# Altium PCB PDB.PcbDoc (part 1 of 3)
Units mil, origin at the board's own origin, x right, y up, seen from the top; angles counter-clockwise.
Board outline 4724.41 x 3149.61 mil, 2 copper layers (Top Layer, Bottom Layer); 64 components, 33 nets, 163 pads, 36 vias.
Unrouted connection lines stored in the file: 2.
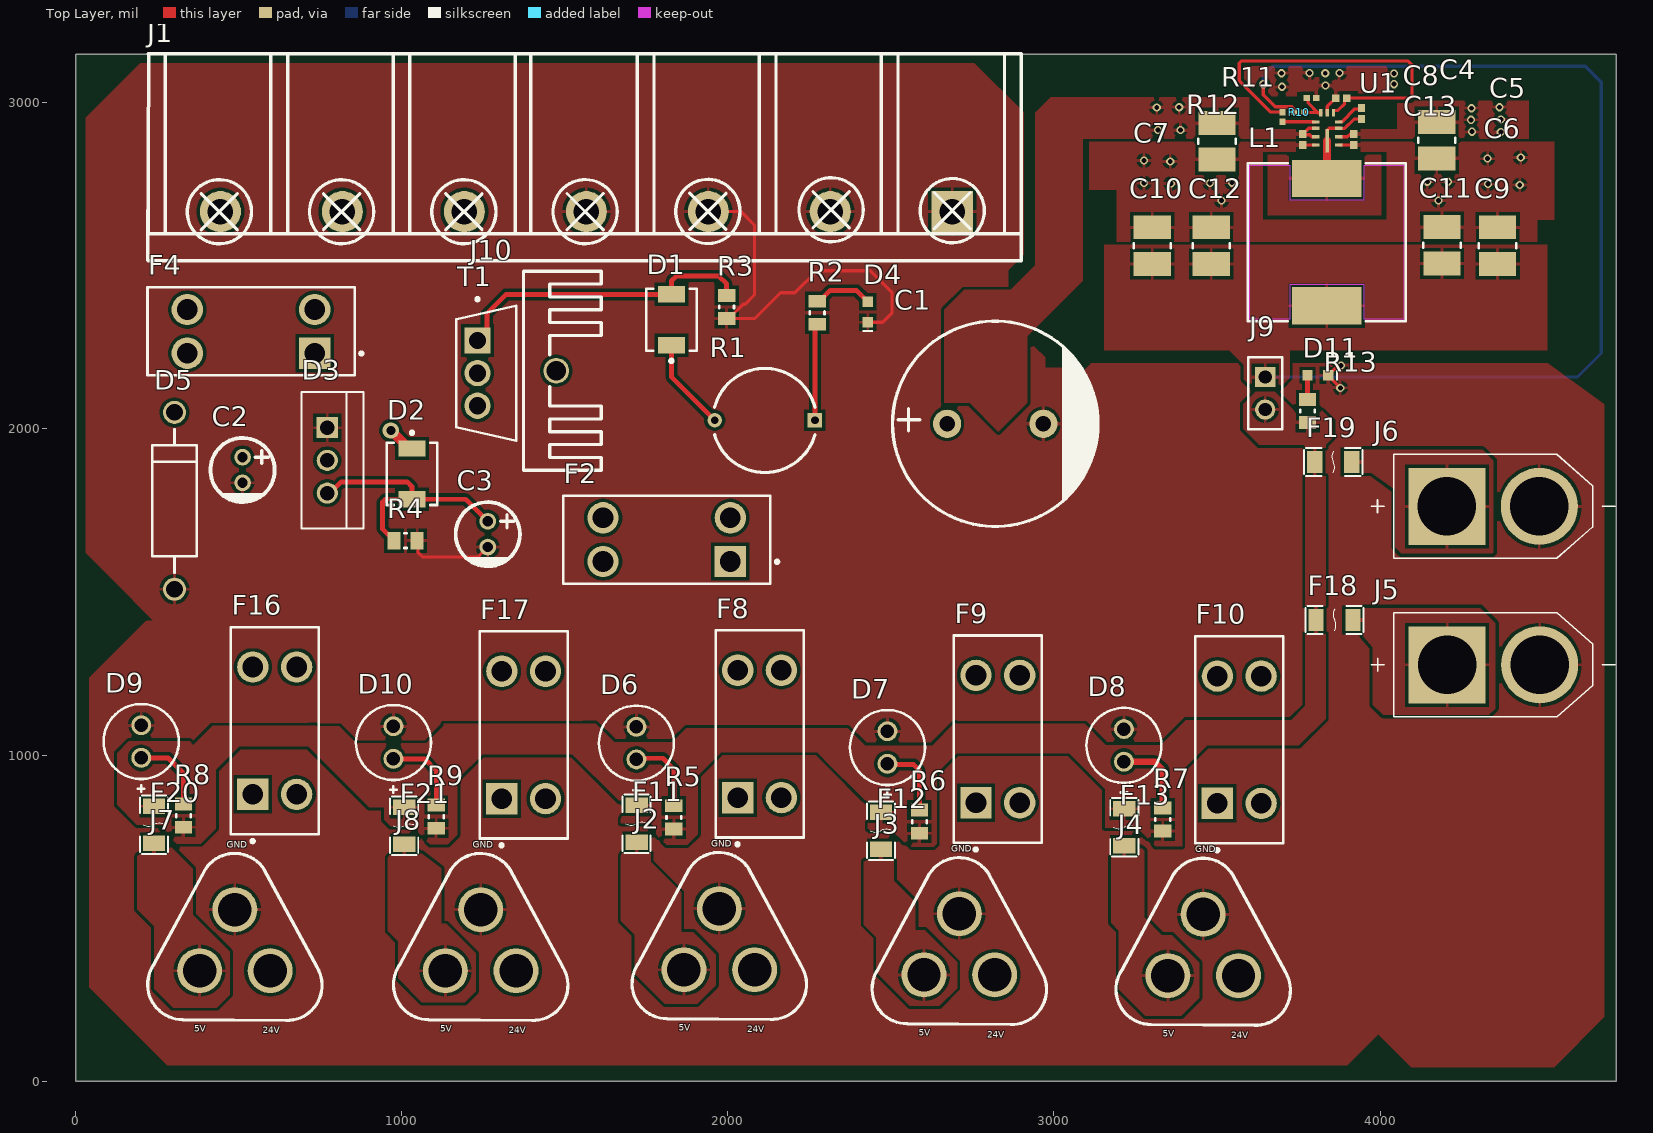
[diagram p0: Top Layer view]
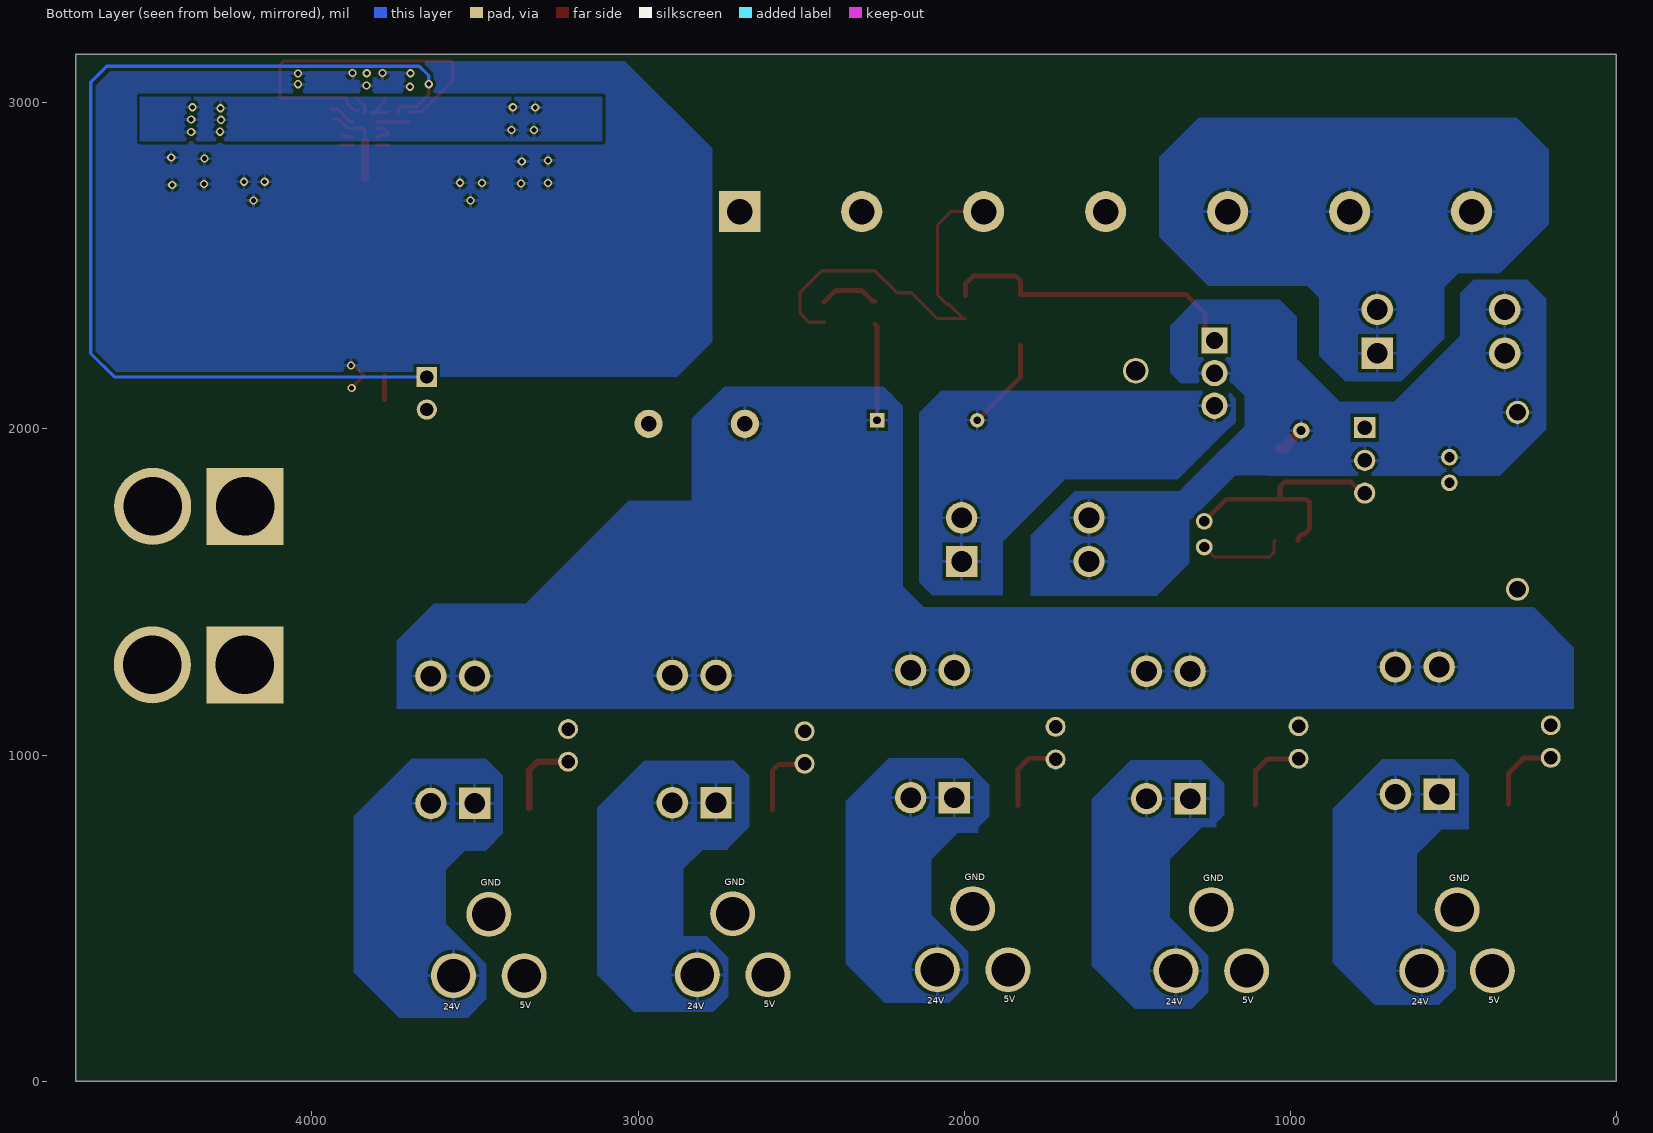
[diagram p1: Bottom Layer view, seen from below]
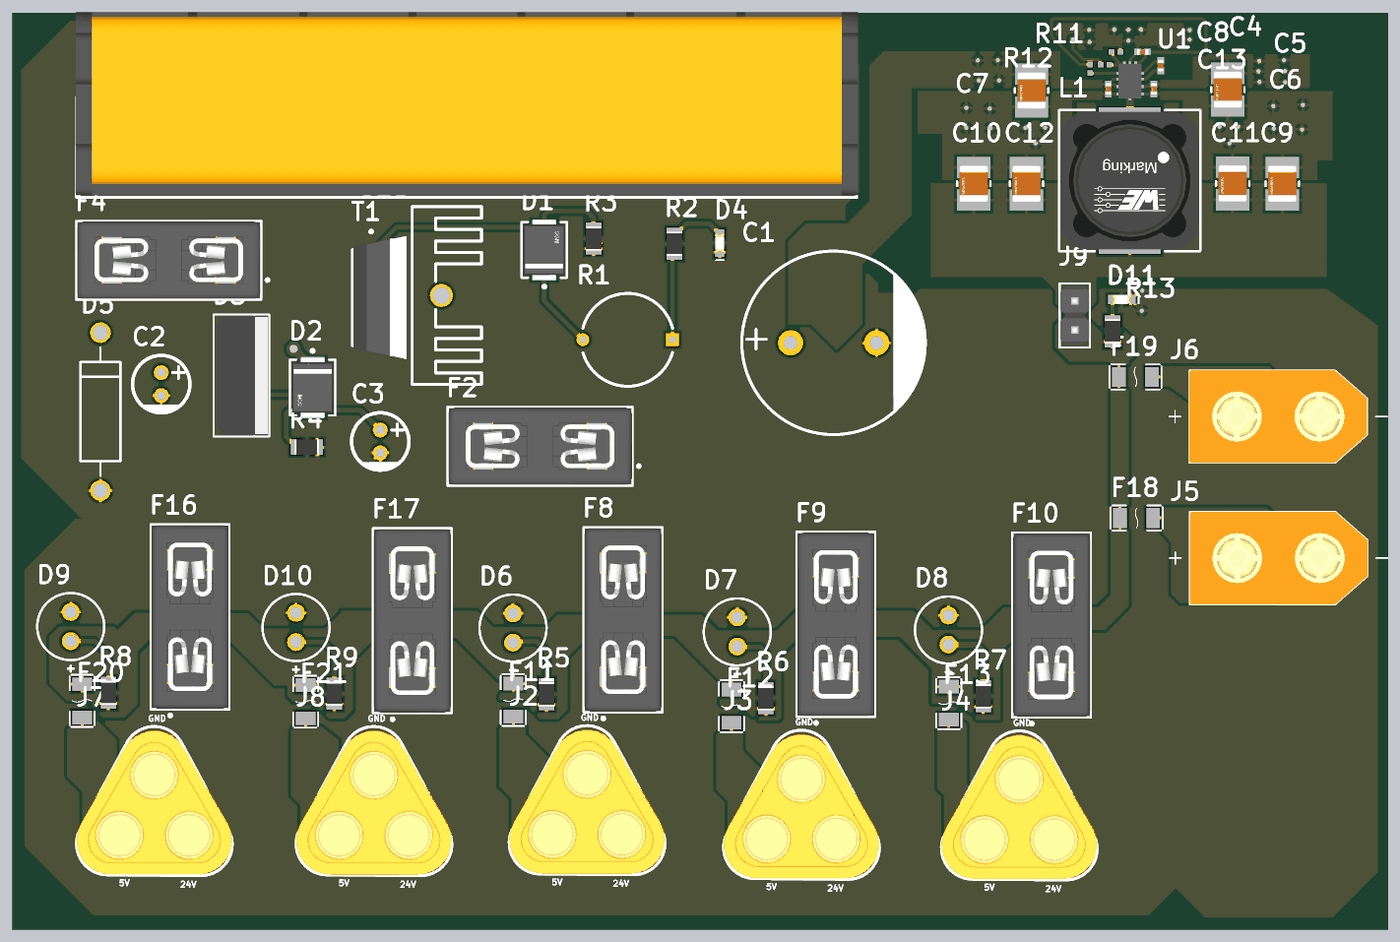
[diagram p2: 3D render of the assembled board from above, using the file's embedded part models]

## Layer stack, top to bottom
Top Solder: solder mask 0.4, Solder Resist, Dk 3.5
Top Layer: signal copper 1.4
Dielectric 1: dielectric 12.6, FR-4, Dk 4.8
Bottom Layer: signal copper 1.4
Bottom Solder: solder mask 0.4, Solder Resist, Dk 3.5

## Board outline
0,0 4724.41,0 4724.41,3149.61 0,3149.61

## Design rules (kind name [scope] priority, off if disabled: settings)
Clearance [All] p1: gap=10 ignorepadtopadclearanceinfootprint=FALSE
PolygonConnect [All] p1: connectstyle=Relief reliefconductorwidth=10 reliefentries=4 polygonreliefangle="90 Angle" airgapwidth=10
RoutingVias [All] p1: holewidth=28 width=50 viastyle="Through Hole" minholewidth=28 minwidth=50 maxholewidth=28 maxwidth=50
SolderMaskExpansion [All] p1: expansion=4 istentingtop=FALSE
SupplyNets "Schematic Supply Nets_3" [InNet('5V')] p1: voltage=0.000
SupplyNets "Schematic Supply Nets_2" [InNet('5V_Buck Out')] p2: voltage=0.000
SupplyNets "Schematic Supply Nets_1" [InNet('GND')] p3: voltage=0.000
SupplyNets "Schematic Supply Nets" [InNet('24_In')] p4: voltage=0.000
Width [All] p1: maxlimit=100 minlimit=10 preferedwidth=20 minimp=50.000000 maximp=50.000000 favimp=50.000000
30 further rules are at their usual default settings.

## Classes and differential pairs
component class Connectors: D6 D7 D8 D9 D10 F5 F6 F7 F8 F9 F10 F11 F12 F13 F14 F15 F16 F17 F18 F19 F20 F21 J2 J3 J4 J5 J6 J7 J8 R5 R6 R7 R8 R9

## Components (designator, comment, footprint, x,y, rotation, side; value= is the part's Value field where it differs from the comment)
C1 "2200uF 50V cap" "Capacitor through hole" 2819.88,2015.75 r0 top value=2.2mF
C2 "0.1uF 50V THT" "capacitor Through Hole Small" 511.81,1874.02 r270 top value=100nF
C3 "0.1uF 50V THT" "capacitor Through Hole Small" 1263.78,1677.17 r270 top value=100nF
C4 "0.1uF X7R 0402" "0402 CAPACITOR" 3942.91,2967.52 r270 top value=100nF
C5 "100nF X7R 1210 50V" "1210 capacitor" 4173.47,2885.04 r270 top value=100nF
C6 "4.7nF X7R 0402 50V" "0402 CAPACITOR" 3919.53,2887.41 r270 top value=4.7nF
C7 "100nF X7R 1210 50V" "1210 capacitor" 3499.76,2882.1 r270 top value=100nF
C8 "4.7nF X7R 0402 50V" "0402 CAPACITOR" 3763.19,2887.37 r270 top value=4.7nF
C9 "22uF X7R 1210" "1210 capacitor" 4360.24,2562.01 r270 top value=22µF
C10 "22uF X7R 1210" "1210 capacitor" 3301.18,2562.01 r270 top value=22µF
C11 "22uF X7R 1210" "1210 capacitor" 4189.96,2562.99 r270 top value=22µF
C12 "22uF X7R 1210" "1210 capacitor" 3482.28,2562.01 r270 top value=22µF
C13 "1uF 16V 0402" "0402 CAPACITOR" 3880.85,3014.36 r180 top value=100nF
D1 "10V Zener Diode" "27V Zener diode" 1826.77,2334.65 r90 top
D2 "27V Zener Diode" "27V Zener diode" 1031.5,1862.2 r270 top
D3 "Thyristor" Thyristor 771.65,2003.94 r270 top
D4 "RED LED" "red led" 2429.13,2358.27 r90 top
D5 "27V TVS Diode" "27V TVS Diode" 303.15,1779.53 r270 top
D6 "GREEN LED" "LED Through Hole" 1719.45,1036.5 r90 top
D7 "GREEN LED" "LED Through Hole" 2489.34,1023.1 r90 top
D8 "GREEN LED" "LED Through Hole" 3214.4,1029.65 r90 top
D9 "GREEN LED" "LED Through Hole" 201.14,1041.46 r90 top
D10 "GREEN LED" "LED Through Hole" 974.56,1038.41 r90 top
D11 "RED LED" "red led" 3809.06,2164.37 r180 top
F2 "Fuse Holder" "FUSE HOLDER" 1812.4,1660.43 r180 top
F4 "Fuse Holder" "FUSE HOLDER" 537.8,2299.21 r180 top
F8 "Fuse Holder" "FUSE HOLDER" 2097.28,1064.79 r90 top
F9 "Fuse Holder" "FUSE HOLDER" 2827.77,1049.04 r90 top
F10 "Fuse Holder" "FUSE HOLDER" 3568.21,1046.85 r90 top
F11 "1.25 Fuse 1206" "Fuse 1206" 1720.34,789.33 r270 top value=57mΩ
F12 "1.25 Fuse 1206" "Fuse 1206" 2469.25,768.05 r270 top value=57mΩ
F13 "1.25 Fuse 1206" "Fuse 1206" 3215.55,778.54 r270 top value=57mΩ
F16 "Fuse Holder" "FUSE HOLDER" 610.49,1074.7 r90 top
F17 "Fuse Holder" "FUSE HOLDER" 1373.86,1061.72 r90 top
F18 "1.25 Fuse 1206" "Fuse 1206" 3860.24,1414.37 r180 top value=57mΩ
F19 "1.25 Fuse 1206" "Fuse 1206" 3856.3,1898.62 r180 top value=57mΩ
F20 "1.25 Fuse 1206" "Fuse 1206" 240.16,786.42 r270 top value=57mΩ
F21 "1.25 Fuse 1206" "Fuse 1206" 1007.55,783.37 r270 top value=57mΩ
J1 "SMPS_IN_1" "7 LUG PIN HEADER" 1565.94,2666.34 r180 top
J2 "M1" MT-60 1973.64,396.65 r0 top
J3 "M2" MT-60 2709.65,380.91 r0 top
J4 "M3" MT-60 3457.51,378.72 r0 top
J5 "Main Controller" XT60-M 4347.44,1276.57 r0 top
J6 "Extra" XT60-M 4346.46,1762.45 r0 top
J7 "M4" MT-60 488.19,393.7 r0 top
J8 "M5" MT-60 1242.13,393.58 r0 top
J9 "2 pin male connector" "2 pin connector" 3647.64,2109.45 r270 top
J10 "Heat Sink" "HEAT SINK" 1473.68,2178.33 r270 top
L1 "8.2uH 6.25A 20mOhm" inductor 3836.61,2572.66 r180 top value=8.2µH
R1 "0.3ohm Thermister" thermistor 2113.19,2026.57 r180 top value=300mΩ
R2 "2.2k 0805 res" "0805 1K Resistor" 2273.74,2356.19 r270 top value=2.2kΩ
R3 "10K 0805 1/8W" "0805 1K Resistor" 1996.06,2374.02 r90 top value=10kΩ
R4 "1k 1/8W Res" "0805 1K Resistor" 1011.81,1657.48 r180 top value=1kΩ
R5 "1k 1/8W Res" "0805 1K Resistor" 1834.51,809.02 r270 top value=1kΩ
R6 "1k 1/8W Res" "0805 1K Resistor" 2587.36,795.61 r270 top value=1kΩ
R7 "1k 1/8W Res" "0805 1K Resistor" 3333.66,802.17 r270 top value=1kΩ
R8 "1k 1/8W Res" "0805 1K Resistor" 330.71,813.98 r270 top value=1kΩ
R9 "1k 1/8W Res" "0805 1K Resistor" 1105.98,810.93 r270 top value=1kΩ
R10 "100k 0402 Res" "0402 resistor" 3751.76,2970.99 r180 top value=100kΩ
R11 "24.9K 0402 res" "0402 resistor" 3789.37,3014.76 r0 top value=24.9kΩ
R12 "100k 0402 Res" "0402 resistor" 3700.29,2956.57 r270 top value=100kΩ
R13 "1k 1/8W Res" "0805 1K Resistor" 3777.56,2055.12 r270 top value=1kΩ
T1 "P Channel Mosfet" "P-Ch Mosfet" 1259.15,2171.21 r0 top value=9.3mΩ
U1 "24V-5V Buck" "BUCK CONVERTER" 3837.61,2914.77 r180 top

## Footprints (in the part's own frame and the unit in brackets; to place one, negate y for a bottom-side part, rotate by r counter-clockwise, add the part's x,y. Pads: shape width x height; smd on the part's side, far side on the other; paste and mask are expansions set on the pad)
"2 pin connector" [mm]
  rect 1.57x1.57 hole 1.02 paste-2539.97 mask+0: 1(-1.27,0)
  round 1.57 hole 1.02 paste-2539.97 mask+0: 2(1.27,0)
  silkscreen extent -2.79,-1.32 2.79,1.32, body extent -2.89,-1.42 2.89,1.42, height 0.25
"7 LUG PIN HEADER" [mm]
  rect 3.21x3.2 hole 2: 1(-28.5,0)
  round 3.2 hole 2: 2(-19,0) 3(-9.5,0) 4(0,0) 5(9.5,0) 6(19,0) 7(28.5,0)
  silkscreen extent -33.87,-12.3 34.16,3.82, body extent -33.97,-12.32 34.23,3.68, height 16.5
"27V TVS Diode" [mm] "AXIAL, 2-Leads, Diameter 3.49mm"
  round 1.8 hole 1.3: 1(-6.887,0) 2(6.887,0)
  silkscreen extent -5.59,-1.75 5.59,1.75
"27V Zener diode" [mm]
  rect 1.27x2.11 smd paste+0 mask+0: 1(-1.98,0) 2(1.98,0)
  silkscreen extent -3.32,-1.97 2.42,1.97, body extent -2.72,-2.07 2.72,2.07, height 0.25
"0402 CAPACITOR" [mil]
  rect 24.23x22.54 smd paste+0 mask+0: 1(-16.87,0) 2(16.87,0)
  body extent -35,-17 35,17, height 10
"0402 resistor" [mm] "Chip Resistor, 2-Leads, Body 1.00x0.50mm, IPC High Density"
  rect 0.5x0.45 smd: 1(-0.375,0) 2(0.375,0)
  body extent -0.53,-0.27 0.53,0.28, height 0.4
"0805 1K Resistor" [mm] "Chip Resistor, 2-Leads, Body 2.1x1.35mm, IPC Medium Density"
  rect 1x1.35 smd: 1(-0.9,0) 2(0.9,0)
  silkscreen extent -0.1,-0.58 0.1,0.58, body extent -1.05,-0.68 1.05,0.67, height 0.6
"1210 capacitor" [mil]
  rect 72.94x114.34 smd paste+0 mask+0: 1(-56.11,0) 2(56.11,0)
  silkscreen extent -8,-57 8,57, body extent -112,-77 112,77, height 10
"BUCK CONVERTER" [mm]
  rect 0.6x0.25 smd paste+0 mask+0: 1(-0.9,1.125) 2(-0.9,0.475) 3(-0.9,-0.175) 4(-0.9,-0.675) 8(0.9,-0.675) 9(0.9,-0.175) 10(0.9,0.475) 11(0.9,1.125)
  rect 0.25x0.6 smd paste+0 mask+0: 5(-0.5,-1.4) 6(0,-1.4) 7(0.5,-1.4)
  rect 0.25x1.825 smd paste-0.9 mask+0: 12(0,0.788)
  body extent -1,-1.5 1,1.5, height 1
"Capacitor through hole" [mm]
  round 2.2 hole 1.2: 1(-3.75,0) 2(3.75,0)
  silkscreen extent -8,-8 8,8
"capacitor Through Hole Small" [mm]
  round 1.3 hole 0.8: 1(-1,0) 2(1,0)
  silkscreen extent -2.5,-2.5 2.5,2.5
"Fuse 1206" [mm]
  rect 1.19x1.728 smd: 1(-1.445,0) 2(1.445,0)
  silkscreen extent -2.27,-1.09 2.27,1.09
"FUSE HOLDER" [mm]
  round 2.45 hole 1.6 paste-2539.97 mask+0: 1(-4.96,-1.7) 2(4.96,-1.7) 2(4.96,1.7)
  rect 2.45x2.45 hole 1.6 paste-2539.97 mask+0: 1(-4.96,1.7)
  silkscreen extent -8.73,-3.43 8.07,3.43, body extent -8.17,-3.53 8.17,3.53, height 0.25
"HEAT SINK" [mm]
  round 2 hole 1.5: 1(0,0)
  silkscreen extent -7.75,-2.54 7.75,3.5
inductor [mm] "SMT Shielded Power Inductor, 2-leads, body 12x12mm"
  rect 5.4x2.9 smd: 1(0,-4.95) 2(0,4.95)
  Top Layer keep-out region: -6,6 -2.9,6 -2.9,3.3 2.9,3.3 2.9,6 6,6 6,-6 2.9,-6 2.9,-3.3 -2.9,-3.3 -2.9,-6 -6,-6
  silkscreen extent -6.15,-6.15 6.15,6.15, body extent -6,-6 6,6, height 5.66
"LED Through Hole" [mm] "THD, 2-Leads, Dia 5.845mm, Pitch 2.54mm"
  round 1.55 hole 1.05: 1(-1.27,0) 2(1.27,0)
  silkscreen extent -3.92,-2.92 2.92,2.92
MT-60 [mm]
  round 3.5 hole 2.605: 1(-2.75,-1.397) 2(0,3.366) 3(2.75,-1.397)
  silkscreen extent -6.79,-5.27 6.79,7.74, body extent -6.8,-5.2 6.8,7.39, height 15
"P-Ch Mosfet" [mm]
  rect 2.05x2.05 hole 1.35 paste-2539.97 mask+0: 1(-0.683,2.54)
  round 2.05 hole 1.35 paste-2539.97 mask+0: 2(-0.683,0) 3(-0.683,-2.54)
  silkscreen extent -2.32,-5.26 2.32,5.88, body extent -2.42,-5.36 2.42,5.36, height 0.25
"red led" [mm] "SMD Mono-color Chip LED, body 1.60 x 0.80 mm"
  rect 0.8x0.8 smd: 1(-0.8,0) 2(0.8,0)
  silkscreen extent -1.55,-0.4 -1.4,0.4, body extent -0.8,-0.4 0.8,0.4, height 0.7
thermistor [mil]
  rect 44x44 / inner round 44 / far side rect 44x44 hole 24: 1(-153.54,0)
  round 44 hole 24: 2(153.54,0)
  silkscreen extent -154,-159 154,160
Thyristor [mil]
  rect 65x65 hole 45 paste-99999 mask+0: 1(0,0)
  round 65 hole 45 paste-99999 mask+0: 2(100.39,0) 3(200.79,0)
  silkscreen extent -109,-80 310,111, body extent -104,-74 305,106, height 774
XT60-M [mm]
  rect 6x6 / inner round 6 / far side rect 6x6 hole 4.55: 1(-3.6,0)
  round 6 hole 4.55: 2(3.6,0)
  silkscreen extent -9.5,-4.05 9.5,4.05, body extent -7.75,-4.05 7.75,4.05, height 16

## Part data
C1: library part ESE228M050AN2AA, "Aluminum Electrolytic Capacitor, Polarized, Aluminum (wet), 50V, 20% +Tol, 20% -Tol, 2200uF, Through Hole Mount", Case/Package=Aluminum, LCSC Part No=C5113332, Leakage Current=1.103mA, Manufacturer="Yageo Group", Max Operating Temperature=105°C, Min Operating Temperature=-40°C, Ripple Current=1.53A, Supplier Part Number=399-ESE228M050AN2AA-ND, Tolerance=20%, Voltage Rating=50V, Category="Aluminum Electrolytic Capacitors", componentlink1description=https://datasheet.octopart.com:443/ESE228M050AN2AA-KEMET-datasheet-182055943.pdf?src-supplier=IHS, componentlink1url=https://datasheet.octopart.com:443/ESE228M050AN2AA-KEMET-datasheet-182055943.pdf?src-supplier=IHS, Export Control Classification Number (ECCN) Code=EAR99, Lead Pitch=7.5mm, Length=36mm, Manufacturer Part Number=ESE228M050AN2AA, Number of Terminals=2, Packaging=Bulk, Pricing="1=2.22, 10=1.461, 50=1.144, 100=1.0439, 500=0.8717, 1000=0.8175, 2500=0.75967, 5000=0.72446 (USD)", RoHS=Compliant, Schedule B="8532220020, 8532220020|8532220020|8532220020|8532220020|8532220020", Stock=1668, Supplier=DigiKey, Termination=Radial, Voltage Rating (DC)=50V
C2 C3: library part 515D104M050HW6AE3, "Cap 0.1UF 50V 4X7 85C Rdl", Case/Package=Radial, Manufacturer=Vishay, Max Operating Temperature=85°C, Min Operating Temperature=-40°C, Tolerance=20%, Voltage Rating=50V, Category="Aluminum Electrolytic Capacitors", componentlink1description=http://sigma.octopart.com:80/rohs_statement/Vishay-company-15.pdf?src-supplier=Compliance+Statements, componentlink1url=http://sigma.octopart.com:80/rohs_statement/Vishay-company-15.pdf?src-supplier=Compliance+Statements, Height - Seated (Max)=7.0104mm, Lead Pitch=1.4986mm, Life (Hours)=2000hours, Manufacturer Part Number=515D104M050HW6AE3, Mounting Technology="Through Hole", Packaging=Bulk, Polarity=Polar, Pricing="5000=0.10011, 10000=0.09869, 20000=0.09727, 40000=0.09585, 80000=0.09479 (USD)", RoHS=Compliant, Supplier=Avnet, Supplier Part Number=515D104M050HW6AE3
C4: library part GCM155R71H104KE02J, "50V 100nF X7R ±10% 0402 Multilayer Ceramic Capacitors MLCC - SMD/SMT ROHS", Case Code (Imperial)=0402, Case Code (Metric)=1005, Dielectric=X7R, Dielectric Material=Ceramic, LCSC Part No=C2649549, Manufacturer=Murata, Manufacturer Lifecycle Status="IN PRODUCTION", Max Operating Temperature=125°C, Min Operating Temperature=-55°C, Ratings=AEC-Q200, Tolerance=10%, Voltage Rating=50V, Case/Package=0402, Category="Ceramic Capacitors", componentlink1description=https://datasheet.octopart.com:443/GCM155R71H104KE02J-Murata-datasheet-155345015.pdf?src-supplier=Newark, componentlink1url=https://datasheet.octopart.com:443/GCM155R71H104KE02J-Murata-datasheet-155345015.pdf?src-supplier=Newark, ComponentLink2Description=https://datasheet.octopart.com:443/GCM155R71H104KE02J-Murata-datasheet-178519985.pdf?src-supplier=Arrow.cn, ComponentLink2URL=https://datasheet.octopart.com:443/GCM155R71H104KE02J-Murata-datasheet-178519985.pdf?src-supplier=Arrow.cn, ComponentLink3Description=https://datasheet.octopart.com:443/GCM155R71H104KE02J-Murata-datasheet-141266224.pdf?src-supplier=Ciiva, ComponentLink3URL=https://datasheet.octopart.com:443/GCM155R71H104KE02J-Murata-datasheet-141266224.pdf?src-supplier=Ciiva, ComponentLink4Description=https://datasheet.octopart.com:443/GCM155R71H104KE02J-Murata-datasheet-140656751.pdf?src-supplier=Ciiva, ComponentLink4URL=https://datasheet.octopart.com:443/GCM155R71H104KE02J-Murata-datasheet-140656751.pdf?src-supplier=Ciiva, ComponentLink5Description=https://datasheet.octopart.com:443/GCM155R71H104KE02J-Murata-datasheet-138716456.pdf?src-supplier=Ciiva, ComponentLink5URL=https://datasheet.octopart.com:443/GCM155R71H104KE02J-Murata-datasheet-138716456.pdf?src-supplier=Ciiva, ComponentLink6Description=https://datasheet.octopart.com:443/GCM155R71H104KE02J-Murata-datasheet-77992203.pdf?src-supplier=Future+Electronics, ComponentLink6URL=https://datasheet.octopart.com:443/GCM155R71H104KE02J-Murata-datasheet-77992203.pdf?src-supplier=Future+Electronics, ComponentLink7Description=https://datasheet.octopart.com:443/GCM155R71H104KE02J-Murata-datasheet-12511495.pdf?src-supplier=TME, ComponentLink7URL=https://datasheet.octopart.com:443/GCM155R71H104KE02J-Murata-datasheet-12511495.pdf?src-supplier=TME, ComponentLink8Description=http://sigma.octopart.com:80/reach_statement/Murata-company-16.pdf?src-supplier=Compliance+Statements, ComponentLink8URL=http://sigma.octopart.com:80/reach_statement/Murata-company-16.pdf?src-supplier=Compliance+Statements, Country of Origin=Philippines, Export Control Classification Number (ECCN) Code=EAR99, Harmonized Tariff Schedule (HTS) Code=8532.24.00.20, Height=500µm, Introduction Date=2013-11-20, Length=1mm, Lifecycle Status=Production, Manufacturer Part Number=GCM155R71H104KE02J, Material=Ceramic, Mounting Technology="Surface Mount", Number of Terminals=2, Packaging="Tape & Reel (TR)", Pricing="50000=0.008, 100000=0.0078 (USD)", REACH SVHC=Yes, RoHS=Compliant, Schedule B="8532240020, 8532240020|8532240020, 8532240020|8532240020|8532240020, 8532240020|8532240020|8532240020|8532240020", Stock=2050000, Supplier="Arrow Electronics", Supplier Part Number=GCM155R71H104KE02J, Termination=SMD/SMT, Voltage Rating (DC)=50V, Weight=6.010099mg, Width=500µm
C5 C7: library part CC1210KKX7R9BB104, "50V 100nF X7R ±10% 1210 Multilayer Ceramic Capacitors MLCC - SMD/SMT ROHS", Case Code (Imperial)=1210, Case Code (Metric)=3225, Dielectric=X7R, Dielectric Material=Ceramic, Manufacturer="Yageo Group", Max Operating Temperature=125°C, Min Operating Temperature=-55°C, Supplier Part Number=311-4522-1-ND, Tolerance=10%, Voltage Rating=50V, Case/Package=1210, Category="Ceramic Capacitors", China RoHS=Compliant, componentlink1description=https://datasheet.octopart.com:443/CC1210KKX7R9BB104-Yageo-datasheet-177165144.pdf?src-supplier=IHS, componentlink1url=https://datasheet.octopart.com:443/CC1210KKX7R9BB104-Yageo-datasheet-177165144.pdf?src-supplier=IHS, ComponentLink2Description=https://datasheet.octopart.com:443/CC1210KKX7R9BB104-Yageo-Group-datasheet-189192896.pdf?src-supplier=Future+Electronics, ComponentLink2URL=https://datasheet.octopart.com:443/CC1210KKX7R9BB104-Yageo-Group-datasheet-189192896.pdf?src-supplier=Future+Electronics, ComponentLink3Description=https://datasheet.octopart.com:443/CC1210KKX7R9BB104-Yageo-datasheet-166511530.pdf?src-supplier=Future+Electronics, ComponentLink3URL=https://datasheet.octopart.com:443/CC1210KKX7R9BB104-Yageo-datasheet-166511530.pdf?src-supplier=Future+Electronics, ComponentLink4Description=https://datasheet.octopart.com:443/CC1210KKX7R9BB104-Yageo-datasheet-137700082.pdf?src-supplier=Future+Electronics, ComponentLink4URL=https://datasheet.octopart.com:443/CC1210KKX7R9BB104-Yageo-datasheet-137700082.pdf?src-supplier=Future+Electronics, ComponentLink5Description=https://datasheet.octopart.com:443/CC1210KKX7R9BB104-Yageo-datasheet-137700084.pdf?src-supplier=Future+Electronics, ComponentLink5URL=https://datasheet.octopart.com:443/CC1210KKX7R9BB104-Yageo-datasheet-137700084.pdf?src-supplier=Future+Electronics, ComponentLink6Description=https://datasheet.octopart.com:443/CC1210KKX7R9BB104-Yageo-datasheet-27626582.pdf?src-supplier=Future+Electronics, ComponentLink6URL=https://datasheet.octopart.com:443/CC1210KKX7R9BB104-Yageo-datasheet-27626582.pdf?src-supplier=Future+Electronics, ComponentLink7Description=https://datasheet.octopart.com:443/CC1210KKX7R9BB104-Yageo-datasheet-15895757.pdf?src-supplier=Future+Electronics, ComponentLink7URL=https://datasheet.octopart.com:443/CC1210KKX7R9BB104-Yageo-datasheet-15895757.pdf?src-supplier=Future+Electronics, ComponentLink8Description=https://datasheet.octopart.com:443/CC1210KKX7R9BB104-Yageo-datasheet-181971219.pdf?src-supplier=Newark, ComponentLink8URL=https://datasheet.octopart.com:443/CC1210KKX7R9BB104-Yageo-datasheet-181971219.pdf?src-supplier=Newark, ComponentLink9Description=https://datasheet.octopart.com/CC1210KKX7R9BB104-Yageo-datasheet-10883670.pdf, ComponentLink9URL=https://datasheet.octopart.com/CC1210KKX7R9BB104-Yageo-datasheet-10883670.pdf, ComponentLink10Description=https://datasheet.octopart.com/CC1210KKX7R9BB104-Yageo-datasheet-12526321.pdf, ComponentLink10URL=https://datasheet.octopart.com/CC1210KKX7R9BB104-Yageo-datasheet-12526321.pdf, ComponentLink11Description=https://datasheet.octopart.com:443/CC1210KKX7R9BB104-Yageo-Group-datasheet-165992755.pdf?src-supplier=ODG+(Origin+Data+Global), ComponentLink11URL=https://datasheet.octopart.com:443/CC1210KKX7R9BB104-Yageo-Group-datasheet-165992755.pdf?src-supplier=ODG+(Origin+Data+Global), ComponentLink12Description=http://sigma.octopart.com:80/rohs_statement/Surface-Mount-Ceramic-Multilayer-Capacitors%3B-General-Purpose-%26-High-Capacitance-Class-2%2C-X7R-Yageo-family-124.pdf?src-supplier=Compliance+Statements, ComponentLink12URL=http://sigma.octopart.com:80/rohs_statement/Surface-Mount-Ceramic-Multilayer-Capacitors%3B-General-Purpose-%26-High-Capacitance-Class-2%2C-X7R-Yageo-family-124.pdf?src-supplier=Compliance+Statements, ComponentLink13Description=http://sigma.octopart.com:80/reach_statement/Surface-Mount-Ceramic-Multilayer-Capacitors%3B-General-Purpose-%26-High-Capacitance-Class-2%2C-X7R-Yageo-family-125.pdf?src-supplier=Compliance+Statements, ComponentLink13URL=http://sigma.octopart.com:80/reach_statement/Surface-Mount-Ceramic-Multilayer-Capacitors%3B-General-Purpose-%26-High-Capacitance-Class-2%2C-X7R-Yageo-family-125.pdf?src-supplier=Compliance+Statements, ComponentLink14Description=http://sigma.octopart.com:80/conflict_mineral_statement/Yageo-company-3.pdf?src-supplier=Compliance+Statements, ComponentLink14URL=http://sigma.octopart.com:80/conflict_mineral_statement/Yageo-company-3.pdf?src-supplier=Compliance+Statements, ComponentLink15Description=http://sigma.octopart.com:80/rohs_statement/Yageo-company-2.pdf?src-supplier=Compliance+Statements, ComponentLink15URL=http://sigma.octopart.com:80/rohs_statement/Yageo-company-2.pdf?src-supplier=Compliance+Statements, Composition=Ceramic, Depth=2.5mm, Halogen Free="Halogen Free", Height=850µm, Lead Free="Lead Free", Length=3.2mm, Lifecycle Status=Production, Manufacturer Part Number=CC1210KKX7R9BB104, Mounting Technology="Surface Mount", Number of Terminals=2, Packaging="Tape and Reel", Pricing="1=0.49, 10=0.296, 50=0.221, 100=0.1979, 500=0.15896, 1000=0.14693 (USD)", Radiation Hardening=No, REACH SVHC=Yes, RoHS=Compliant, Schedule B="8532240020, 8532240020|8532240020|8532240020|8532240020|8532240020", Stock=13190, Supplier=DigiKey, Termination=SMD/SMT, Thickness=939.8µm, Voltage Rating (DC)=50V, Width=2.5mm
C6 C8: library part C0402C472J5RECTU, "Multilayer Ceramic Capacitors MLCC - SMD/SMT 50V 4700pF X7R 0402 5%", Case/Package=0402, Dielectric Material=Ceramic, Manufacturer="Yageo Group", Max Operating Temperature=125°C, Min Operating Temperature=-55°C, Supplier Part Number=399-C0402C472J5RECTUCT-ND, Voltage Rating (DC)=50V, Category="Ceramic Capacitors", China RoHS=Compliant, componentlink1description=https://datasheet.octopart.com:443/C0402C472J5RECTU-KEMET-datasheet-178568699.pdf?src-supplier=IHS, componentlink1url=https://datasheet.octopart.com:443/C0402C472J5RECTU-KEMET-datasheet-178568699.pdf?src-supplier=IHS, ComponentLink2Description=https://datasheet.octopart.com:443/C0402C472J5RECTU-KEMET-datasheet-189885673.pdf?src-supplier=element14+APAC, ComponentLink2URL=https://datasheet.octopart.com:443/C0402C472J5RECTU-KEMET-datasheet-189885673.pdf?src-supplier=element14+APAC, Country of Origin=Mexico, Export Control Classification Number (ECCN) Code=EAR99, Harmonized Tariff Schedule (HTS) Code=8532.24.00.20, Height=500µm, Introduction Date=2018-03-06, Length=1mm, Lifecycle Status=Production, Manufacturer Part Number=C0402C472J5RECTU, Mounting Technology="Surface Mount", Number of Terminals=2, Pricing="1=0.13, 10=0.072, 50=0.0504, 100=0.0437, 500=0.03246, 1000=0.02899, 2500=0.02536, 5000=0.02317 (USD)", REACH SVHC=Yes, RoHS=Compliant, Stock=10769, Supplier=DigiKey, Width=500µm
C9 C10 C11 C12: library part CL32B226MOJNNNE, "16V 22uF X7R 卤20% 1210 Multilayer Ceramic Capacitors MLCC - SMD/SMT ROHS", Case Code (Imperial)=1210, Case Code (Metric)=3225, Dielectric=X7R, Dielectric Material=Ceramic, LCSC Part No=C2980161, Manufacturer="Samsung Electro-Mechanics", Max Operating Temperature=125°C, Min Operating Temperature=-55°C, Tolerance=20%, Voltage Rating=16V, Case/Package=1210, Category="Ceramic Capacitors", China RoHS=Compliant, componentlink1description=https://datasheet.octopart.com:443/CL32B226MOJNNNE-Samsung-Electro-Mechanics-datasheet-136482671.pdf?src-supplier=IHS, componentlink1url=https://datasheet.octopart.com:443/CL32B226MOJNNNE-Samsung-Electro-Mechanics-datasheet-136482671.pdf?src-supplier=IHS, ComponentLink2Description=https://datasheet.octopart.com:443/CL32B226MOJNNNE-Samsung-Electro-Mechanics-datasheet-149049213.pdf?src-supplier=Future+Electronics, ComponentLink2URL=https://datasheet.octopart.com:443/CL32B226MOJNNNE-Samsung-Electro-Mechanics-datasheet-149049213.pdf?src-supplier=Future+Electronics, ComponentLink3Description=https://datasheet.octopart.com:443/CL32B226MOJNNNE-Samsung-Electro-Mechanics-datasheet-116051344.pdf?src-supplier=Future+Electronics, ComponentLink3URL=https://datasheet.octopart.com:443/CL32B226MOJNNNE-Samsung-Electro-Mechanics-datasheet-116051344.pdf?src-supplier=Future+Electronics, ComponentLink4Description=https://datasheet.octopart.com:443/CL32B226MOJNNNE-Samsung-Electro-Mechanics-datasheet-81462651.pdf?src-supplier=Future+Electronics, ComponentLink4URL=https://datasheet.octopart.com:443/CL32B226MOJNNNE-Samsung-Electro-Mechanics-datasheet-81462651.pdf?src-supplier=Future+Electronics, ComponentLink5Description=https://datasheet.octopart.com:443/CL32B226MOJNNNE-Samsung-datasheet-26673912.pdf?src-supplier=Future+Electronics, ComponentLink5URL=https://datasheet.octopart.com:443/CL32B226MOJNNNE-Samsung-datasheet-26673912.pdf?src-supplier=Future+Electronics, ComponentLink6Description=https://datasheet.octopart.com:443/CL32B226MOJNNNE-Samsung-datasheet-37081328.pdf?src-supplier=Future+Electronics, ComponentLink6URL=https://datasheet.octopart.com:443/CL32B226MOJNNNE-Samsung-datasheet-37081328.pdf?src-supplier=Future+Electronics, ComponentLink7Description=https://datasheet.octopart.com/CL32B226MOJNNNE-Samsung-Electro-Mechanics-datasheet-97040617.pdf, ComponentLink7URL=https://datasheet.octopart.com/CL32B226MOJNNNE-Samsung-Electro-Mechanics-datasheet-97040617.pdf, ComponentLink8Description=https://datasheet.octopart.com/CL32B226MOJNNNE-Samsung-Electro-Mechanics-datasheet-8324245.pdf, ComponentLink8URL=https://datasheet.octopart.com/CL32B226MOJNNNE-Samsung-Electro-Mechanics-datasheet-8324245.pdf, ComponentLink9Description=https://datasheet.octopart.com/General-Multilayer-Ceramic-Capacitors-Samsung-datasheet-family-111.pdf, ComponentLink9URL=https://datasheet.octopart.com/General-Multilayer-Ceramic-Capacitors-Samsung-datasheet-family-111.pdf, ComponentLink10Description=http://sigma.octopart.com:80/rohs_certificate/General-Multilayer-Ceramic-Capacitors-Samsung-family-110.pdf?src-supplier=Compliance+Statements, ComponentLink10URL=http://sigma.octopart.com:80/rohs_certificate/General-Multilayer-Ceramic-Capacitors-Samsung-family-110.pdf?src-supplier=Compliance+Statements, ComponentLink11Description=http://sigma.octopart.com:80/rohs_statement/General-Multilayer-Ceramic-Capacitors-Samsung-family-132.pdf?src-supplier=Compliance+Statements, ComponentLink11URL=http://sigma.octopart.com:80/rohs_statement/General-Multilayer-Ceramic-Capacitors-Samsung-family-132.pdf?src-supplier=Compliance+Statements, ComponentLink12Description=http://sigma.octopart.com:80/reach_statement/General-Multilayer-Ceramic-Capacitors-Samsung-family-133.pdf?src-supplier=Compliance+Statements, ComponentLink12URL=http://sigma.octopart.com:80/reach_statement/General-Multilayer-Ceramic-Capacitors-Samsung-family-133.pdf?src-supplier=Compliance+Statements, Country of Origin="Mainland China, Philippines, South Korea", Depth=2.5mm, Export Control Classification Number (ECCN) Code=EAR99, Harmonized Tariff Schedule (HTS) Code=8532.24.00.20, Height=2.8mm, Introduction Date=2010-04-14, Length=3.2mm, Lifecycle Status=Production, Manufacturer Part Number=CL32B226MOJNNNE, Material=Ceramic, Mounting Technology="Surface Mount", Number of Terminals=2, Packaging="Tape & Reel", Pricing="1000=0.0959, 3000=0.0934, 5000=0.0923, 20000=0.0892, 30000=0.0873 (USD)", Radiation Hardening=No, REACH SVHC=Yes, RoHS=Compliant, Schedule B="8532240020, 8532240020|8532240020, 8532240020|8532240020|8532240020, 8532240020|8532240020|8532240020|8532240020", Stock=33000, Supplier="Future Electronics", Supplier Part Number=CL32B226MOJNNNE, Thickness=2.6924mm, Voltage Rating (DC)=16V, Width=2.4892mm
C13: library part CC0402KRX7R7BB104, "16V 1uF X5R 卤10% 0402 Multilayer Ceramic Capacitors MLCC - SMD/SMT ROHS", Case Code (Imperial)=0402, Case Code (Metric)=1005, Dielectric=X7R, Dielectric Material=Ceramic, Manufacturer="Yageo Group", Max Operating Temperature=125°C, Min Operating Temperature=-55°C, Temperature Coefficient=30ppm/°C, Tolerance=10%, Voltage=16V, Case/Package=0402, Category="Ceramic Capacitors", China RoHS=Compliant, componentlink1description=https://datasheet.octopart.com:443/CC0402KRX7R7BB104-Yageo-datasheet-177165144.pdf?src-supplier=IHS, componentlink1url=https://datasheet.octopart.com:443/CC0402KRX7R7BB104-Yageo-datasheet-177165144.pdf?src-supplier=IHS, ComponentLink2Description=https://datasheet.octopart.com/CC0402KRX7R7BB104-Yageo-datasheet-10883670.pdf, ComponentLink2URL=https://datasheet.octopart.com/CC0402KRX7R7BB104-Yageo-datasheet-10883670.pdf, ComponentLink3Description=https://datasheet.octopart.com/CC0402KRX7R7BB104-Yageo-datasheet-12526321.pdf, ComponentLink3URL=https://datasheet.octopart.com/CC0402KRX7R7BB104-Yageo-datasheet-12526321.pdf, ComponentLink4Description=https://datasheet.octopart.com:443/CC0402KRX7R7BB104-Yageo-datasheet-82288757.pdf?src-supplier=Upverter, ComponentLink4URL=https://datasheet.octopart.com:443/CC0402KRX7R7BB104-Yageo-datasheet-82288757.pdf?src-supplier=Upverter, ComponentLink5Description=https://datasheet.octopart.com:443/CC0402KRX7R7BB104-Yageo-datasheet-78855684.pdf?src-supplier=Upverter, ComponentLink5URL=https://datasheet.octopart.com:443/CC0402KRX7R7BB104-Yageo-datasheet-78855684.pdf?src-supplier=Upverter, ComponentLink6Description=https://datasheet.octopart.com:443/CC0402KRX7R7BB104-Yageo-datasheet-68298032.pdf?src-supplier=Upverter, ComponentLink6URL=https://datasheet.octopart.com:443/CC0402KRX7R7BB104-Yageo-datasheet-68298032.pdf?src-supplier=Upverter, ComponentLink7Description=https://datasheet.octopart.com:443/CC0402KRX7R7BB104-Yageo-datasheet-181967370.pdf?src-supplier=Newark, ComponentLink7URL=https://datasheet.octopart.com:443/CC0402KRX7R7BB104-Yageo-datasheet-181967370.pdf?src-supplier=Newark, ComponentLink8Description=https://datasheet.octopart.com:443/CC0402KRX7R7BB104-Yageo-datasheet-181967368.pdf?src-supplier=Newark, ComponentLink8URL=https://datasheet.octopart.com:443/CC0402KRX7R7BB104-Yageo-datasheet-181967368.pdf?src-supplier=Newark, ComponentLink9Description=https://datasheet.octopart.com:443/CC0402KRX7R7BB104-Yageo-datasheet-499490.pdf?src-supplier=Newark, ComponentLink9URL=https://datasheet.octopart.com:443/CC0402KRX7R7BB104-Yageo-datasheet-499490.pdf?src-supplier=Newark, ComponentLink10Description=https://datasheet.octopart.com:443/CC0402KRX7R7BB104-Yageo-datasheet-519481.pdf?src-supplier=Newark, ComponentLink10URL=https://datasheet.octopart.com:443/CC0402KRX7R7BB104-Yageo-datasheet-519481.pdf?src-supplier=Newark, ComponentLink11Description=https://datasheet.octopart.com:443/CC0402KRX7R7BB104-Yageo-datasheet-182050774.pdf?src-supplier=Newark, ComponentLink11URL=https://datasheet.octopart.com:443/CC0402KRX7R7BB104-Yageo-datasheet-182050774.pdf?src-supplier=Newark, ComponentLink12Description=https://datasheet.octopart.com:443/CC0402KRX7R7BB104-Yageo-datasheet-62336348.pdf?src-supplier=Farnell, ComponentLink12URL=https://datasheet.octopart.com:443/CC0402KRX7R7BB104-Yageo-datasheet-62336348.pdf?src-supplier=Farnell, ComponentLink13Description=https://datasheet.octopart.com:443/CC0402KRX7R7BB104-Yageo-datasheet-151948686.pdf?src-supplier=Farnell, ComponentLink13URL=https://datasheet.octopart.com:443/CC0402KRX7R7BB104-Yageo-datasheet-151948686.pdf?src-supplier=Farnell, ComponentLink14Description=https://datasheet.octopart.com:443/CC0402KRX7R7BB104-Yageo-Group-datasheet-188689702.pdf?src-supplier=Farnell, ComponentLink14URL=https://datasheet.octopart.com:443/CC0402KRX7R7BB104-Yageo-Group-datasheet-188689702.pdf?src-supplier=Farnell, ComponentLink15Description=https://datasheet.octopart.com:443/CC0402KRX7R7BB104-Yageo-datasheet-8359971.pdf?src-supplier=Farnell, ComponentLink15URL=https://datasheet.octopart.com:443/CC0402KRX7R7BB104-Yageo-datasheet-8359971.pdf?src-supplier=Farnell, ComponentLink16Description=https://datasheet.octopart.com:443/CC0402KRX7R7BB104-Yageo-datasheet-500777.pdf?src-supplier=Farnell, ComponentLink16URL=https://datasheet.octopart.com:443/CC0402KRX7R7BB104-Yageo-datasheet-500777.pdf?src-supplier=Farnell, ComponentLink17Description=https://datasheet.octopart.com:443/CC0402KRX7R7BB104-Yageo-datasheet-137700084.pdf?src-supplier=Burklin+Elektronik, ComponentLink17URL=https://datasheet.octopart.com:443/CC0402KRX7R7BB104-Yageo-datasheet-137700084.pdf?src-supplier=Burklin+Elektronik, ComponentLink18Description=https://datasheet.octopart.com:443/CC0402KRX7R7BB104-Yageo-datasheet-27626582.pdf?src-supplier=Future+Electronics, ComponentLink18URL=https://datasheet.octopart.com:443/CC0402KRX7R7BB104-Yageo-datasheet-27626582.pdf?src-supplier=Future+Electronics, ComponentLink19Description=https://datasheet.octopart.com:443/CC0402KRX7R7BB104-Yageo-datasheet-166511530.pdf?src-supplier=Future+Electronics, ComponentLink19URL=https://datasheet.octopart.com:443/CC0402KRX7R7BB104-Yageo-datasheet-166511530.pdf?src-supplier=Future+Electronics, ComponentLink20Description=https://datasheet.octopart.com:443/CC0402KRX7R7BB104-Yageo-datasheet-137700082.pdf?src-supplier=Future+Electronics, ComponentLink20URL=https://datasheet.octopart.com:443/CC0402KRX7R7BB104-Yageo-datasheet-137700082.pdf?src-supplier=Future+Electronics, ComponentLink21Description=https://datasheet.octopart.com:443/CC0402KRX7R7BB104-Yageo-datasheet-24578986.pdf?src-supplier=Future+Electronics, ComponentLink21URL=https://datasheet.octopart.com:443/CC0402KRX7R7BB104-Yageo-datasheet-24578986.pdf?src-supplier=Future+Electronics, ComponentLink22Description=https://datasheet.octopart.com:443/CC0402KRX7R7BB104-Yageo-datasheet-10911834.pdf?src-supplier=Future+Electronics, ComponentLink22URL=https://datasheet.octopart.com:443/CC0402KRX7R7BB104-Yageo-datasheet-10911834.pdf?src-supplier=Future+Electronics, ComponentLink23Description=https://datasheet.octopart.com:443/CC0402KRX7R7BB104-Yageo-datasheet-8324442.pdf?src-supplier=Future+Electronics, ComponentLink23URL=https://datasheet.octopart.com:443/CC0402KRX7R7BB104-Yageo-datasheet-8324442.pdf?src-supplier=Future+Electronics, ComponentLink24Description=https://datasheet.octopart.com:443/CC0402KRX7R7BB104-Yageo-datasheet-15895757.pdf?src-supplier=element14+APAC, ComponentLink24URL=https://datasheet.octopart.com:443/CC0402KRX7R7BB104-Yageo-datasheet-15895757.pdf?src-supplier=element14+APAC, ComponentLink25Description=https://datasheet.octopart.com:443/CC0402KRX7R7BB104-Yageo-Group-datasheet-165992755.pdf?src-supplier=ODG+(Origin+Data+Global), ComponentLink25URL=https://datasheet.octopart.com:443/CC0402KRX7R7BB104-Yageo-Group-datasheet-165992755.pdf?src-supplier=ODG+(Origin+Data+Global), ComponentLink26Description=https://datasheet.octopart.com:443/CC0402KRX7R7BB104-Yageo-datasheet-140260305.pdf?src-supplier=SOS+electronic, ComponentLink26URL=https://datasheet.octopart.com:443/CC0402KRX7R7BB104-Yageo-datasheet-140260305.pdf?src-supplier=SOS+electronic, ComponentLink27Description=https://datasheet.octopart.com:443/CC0402KRX7R7BB104-Yageo-datasheet-151978998.pdf?src-supplier=SOS+electronic, ComponentLink27URL=https://datasheet.octopart.com:443/CC0402KRX7R7BB104-Yageo-datasheet-151978998.pdf?src-supplier=SOS+electronic, ComponentLink28Description=https://datasheet.octopart.com:443/CC0402KRX7R7BB104-Yageo-datasheet-8701427.pdf?src-supplier=element14, ComponentLink28URL=https://datasheet.octopart.com:443/CC0402KRX7R7BB104-Yageo-datasheet-8701427.pdf?src-supplier=element14, ComponentLink29Description=https://datasheet.octopart.com:443/CC0402KRX7R7BB104-Yageo-datasheet-5301394.pdf?src-supplier=element14, ComponentLink29URL=https://datasheet.octopart.com:443/CC0402KRX7R7BB104-Yageo-datasheet-5301394.pdf?src-supplier=element14, ComponentLink30Description=http://sigma.octopart.com:80/rohs_statement/Surface-Mount-Ceramic-Multilayer-Capacitors%3B-General-Purpose-%26-High-Capacitance-Class-2%2C-X7R-Yageo-family-124.pdf?src-supplier=Compliance+Statements, ComponentLink30URL=http://sigma.octopart.com:80/rohs_statement/Surface-Mount-Ceramic-Multilayer-Capacitors%3B-General-Purpose-%26-High-Capacitance-Class-2%2C-X7R-Yageo-family-124.pdf?src-supplier=Compliance+Statements, ComponentLink31Description=http://sigma.octopart.com:80/reach_statement/Surface-Mount-Ceramic-Multilayer-Capacitors%3B-General-Purpose-%26-High-Capacitance-Class-2%2C-X7R-Yageo-family-125.pdf?src-supplier=Compliance+Statements, ComponentLink31URL=http://sigma.octopart.com:80/reach_statement/Surface-Mount-Ceramic-Multilayer-Capacitors%3B-General-Purpose-%26-High-Capacitance-Class-2%2C-X7R-Yageo-family-125.pdf?src-supplier=Compliance+Statements, ComponentLink32Description=http://sigma.octopart.com:80/conflict_mineral_statement/Yageo-company-3.pdf?src-supplier=Compliance+Statements, ComponentLink32URL=http://sigma.octopart.com:80/conflict_mineral_statement/Yageo-company-3.pdf?src-supplier=Compliance+Statements, ComponentLink33Description=http://sigma.octopart.com:80/rohs_statement/Yageo-company-2.pdf?src-supplier=Compliance+Statements, ComponentLink33URL=http://sigma.octopart.com:80/rohs_statement/Yageo-company-2.pdf?src-supplier=Compliance+Statements, ComponentLink34Description=https://datasheet.octopart.com:443/CL05A105KO5NNNC-Samsung-Electro-Mechanics-datasheet-181960514.pdf?src-supplier=IHS, ComponentLink34URL=https://datasheet.octopart.com:443/CL05A105KO5NNNC-Samsung-Electro-Mechanics-datasheet-181960514.pdf?src-supplier=IHS, ComponentLink35Description=https://datasheet.octopart.com:443/CL05A105KO5NNNC-Samsung-Electro-Mechanics-datasheet-136031720.pdf?src-supplier=Samsung+SCT, ComponentLink35URL=https://datasheet.octopart.com:443/CL05A105KO5NNNC-Samsung-Electro-Mechanics-datasheet-136031720.pdf?src-supplier=Samsung+SCT, ComponentLink36Description=https://datasheet.octopart.com:443/CL05A105KO5NNNC-Samsung-Electro-Mechanics-datasheet-11776774.pdf?src-supplier=Future+Electronics, ComponentLink36URL=https://datasheet.octopart.com:443/CL05A105KO5NNNC-Samsung-Electro-Mechanics-datasheet-11776774.pdf?src-supplier=Future+Electronics, ComponentLink37Description=https://datasheet.octopart.com:443/CL05A105KO5NNNC-Samsung-Electro-Mechanics-datasheet-110226202.pdf?src-supplier=Future+Electronics, ComponentLink37URL=https://datasheet.octopart.com:443/CL05A105KO5NNNC-Samsung-Electro-Mechanics-datasheet-110226202.pdf?src-supplier=Future+Electronics, ComponentLink38Description=https://datasheet.octopart.com:443/CL05A105KO5NNNC-Samsung-Electro-Mechanics-datasheet-81461590.pdf?src-supplier=Future+Electronics, ComponentLink38URL=https://datasheet.octopart.com:443/CL05A105KO5NNNC-Samsung-Electro-Mechanics-datasheet-81461590.pdf?src-supplier=Future+Electronics, ComponentLink39Description=https://datasheet.octopart.com:443/CL05A105KO5NNNC-Samsung-datasheet-42280519.pdf?src-supplier=Future+Electronics, ComponentLink39URL=https://datasheet.octopart.com:443/CL05A105KO5NNNC-Samsung-datasheet-42280519.pdf?src-supplier=Future+Electronics, ComponentLink40Description=https://datasheet.octopart.com:443/CL05A105KO5NNNC-Samsung-datasheet-34152987.pdf?src-supplier=Future+Electronics, ComponentLink40URL=https://datasheet.octopart.com:443/CL05A105KO5NNNC-Samsung-datasheet-34152987.pdf?src-supplier=Future+Electronics, ComponentLink41Description=https://datasheet.octopart.com:443/CL05A105KO5NNNC-Samsung-datasheet-8329584.pdf?src-supplier=Future+Electronics, ComponentLink41URL=https://datasheet.octopart.com:443/CL05A105KO5NNNC-Samsung-datasheet-8329584.pdf?src-supplier=Future+Electronics, ComponentLink42Description=https://datasheet.octopart.com:443/CL05A105KO5NNNC-Samsung-Electro-Mechanics-datasheet-149136633.pdf?src-supplier=Future+Electronics, ComponentLink42URL=https://datasheet.octopart.com:443/CL05A105KO5NNNC-Samsung-Electro-Mechanics-datasheet-149136633.pdf?src-supplier=Future+Electronics, ComponentLink43Description=https://datasheet.octopart.com/CL05A105KO5NNNC-Samsung-Electro-Mechanics-datasheet-97040617.pdf, ComponentLink43URL=https://datasheet.octopart.com/CL05A105KO5NNNC-Samsung-Electro-Mechanics-datasheet-97040617.pdf, ComponentLink44Description=https://datasheet.octopart.com/CL05A105KO5NNNC-Samsung-Electro-Mechanics-datasheet-8324245.pdf, ComponentLink44URL=https://datasheet.octopart.com/CL05A105KO5NNNC-Samsung-Electro-Mechanics-datasheet-8324245.pdf, ComponentLink45Description=https://datasheet.octopart.com:443/CL05A105KO5NNNC-Samsung-datasheet-59220082.pdf?src-supplier=TME, ComponentLink45URL=https://datasheet.octopart.com:443/CL05A105KO5NNNC-Samsung-datasheet-59220082.pdf?src-supplier=TME, Composition=Ceramic, Contact Plating=Tin, Country of Origin="Mainland China, Taiwan", Depth=500µm, Export Control Classification Number (ECCN) Code=EAR99, Halogen Free="Halogen Free", Harmonized Tariff Schedule (HTS) Code=8532.24.00.20, Height=500µm, Introduction Date=2009-04-17, Lead Free="Lead Free", Length=1mm, Lifecycle Status=Production, Manufacturer Part Number=CC0402KRX7R7BB104, Material=Ceramic, Mounting Technology="Surface Mount", Number of Terminals=2, Pins=2, Pricing="20000=0.0011, 100000=0.001, 250000=0.001, 750000=0.001, 1500000=0.0009 (USD)", Radiation Hardening=No, REACH SVHC=Yes, RoHS=Compliant, Schedule B="8532240020, 8532240020|8532240020, 8532240020|8532240020|8532240020, 8532240020|8532240020|8532240020|8532240020", Stock=75670000, Supplier="Future Electronics", Supplier Part Number=CC0402KRX7R7BB104, Termination=SMD/SMT, Thickness=558.8µm, Voltage Rating=16V, Voltage Rating (AC)=16V, Voltage Rating (DC)=16V, Width=500µm
D1: library part SMBJ5347B-TP, "Zener Diode Independent 10V 5W Surface Mount SMB(DO-214AA", Forward Current=200mA, Forward Voltage=1.5V, LCSC Part No=C151743, Manufacturer=MCC, Manufacturer Part Number=3SMBJ5925B-TP, Max Operating Temperature=150°C, Max Power Dissipation=3W, Max Reverse Leakage Current=5µA, Min Operating Temperature=-55°C, Peak Reverse Current=5nA, Reference Voltage=10V, Supplier Part Number=3SMBJ5925B-TPMSCT-ND, Test Current=37.5mA, Tolerance=5%, Category="Zener Diodes", China RoHS=Non-Compliant, componentlink1description=https://datasheet.octopart.com:443/3SMBJ5925B-TP-MCC-datasheet-188909281.pdf?src-supplier=TME, componentlink1url=https://datasheet.octopart.com:443/3SMBJ5925B-TP-MCC-datasheet-188909281.pdf?src-supplier=TME, ComponentLink2Description=https://datasheet.octopart.com:443/3SMBJ5925B-TP-MCC-datasheet-9573749.pdf?src-supplier=RS+(Formerly+Allied+Electronics), ComponentLink2URL=https://datasheet.octopart.com:443/3SMBJ5925B-TP-MCC-datasheet-9573749.pdf?src-supplier=RS+(Formerly+Allied+Electronics), Composition=Zener, Country of Origin="Mainland China, Vietnam", Element Configuration=Single, Export Control Classification Number (ECCN) Code=EAR99, Harmonized Tariff Schedule (HTS) Code=8541.10.00.50, Height=2.44mm, Impedance=4.5Ω, Introduction Date=2007-02-15, Length=4.7mm, Lifecycle Status=Production, Mounting Technology="Surface Mount", Number of Elements=1, Number of Terminals=2, Pins=2, Polarity=Unidirectional, Power Dissipation=3W, Pricing="1=0.49, 10=0.301, 100=0.1903, 500=0.14234, 1000=0.12681 (USD)", REACH SVHC=No, RoHS=Compliant, Stock=312932, Supplier=DigiKey, Voltage Tolerance=5%, Width=3.94mm, Zener Current=37.5mA, Zener Voltage=10V
D2: library part SMBJ5361B-TP, "Zener Diode, 27V, 5W, Do-214Aa Rohs Compliant: Yes", Case/Package=SMB, Forward Voltage=1.2V, LCSC Part No=C3730541, Manufacturer=MCC, Max Junction Temperature (Tj)=150°C, Max Power Dissipation=5W, Max Reverse Leakage Current=500nA, Min Operating Temperature=-55°C, Peak Reverse Current=500pA, Reference Voltage=27V, Reverse Voltage=20.6V, Test Current=50mA, Tolerance=5%, Category="Zener Diodes", China RoHS=Non-Compliant, componentlink1description=https://datasheet.octopart.com:443/SMBJ5361B-TP-MCC-datasheet-179878967.pdf?src-supplier=element14+APAC, componentlink1url=https://datasheet.octopart.com:443/SMBJ5361B-TP-MCC-datasheet-179878967.pdf?src-supplier=element14+APAC, ComponentLink2Description=https://datasheet.octopart.com:443/SMBJ5361B-TP-MCC-datasheet-133521239.pdf?src-supplier=Future+Electronics, ComponentLink2URL=https://datasheet.octopart.com:443/SMBJ5361B-TP-MCC-datasheet-133521239.pdf?src-supplier=Future+Electronics, ComponentLink3Description=https://datasheet.octopart.com:443/SMBJ5361B-TP-MCC-datasheet-13563501.pdf?src-supplier=HQonline, ComponentLink3URL=https://datasheet.octopart.com:443/SMBJ5361B-TP-MCC-datasheet-13563501.pdf?src-supplier=HQonline, ComponentLink4Description=https://datasheet.octopart.com:443/SMBJ5361B-TP-MCC-datasheet-12511215.pdf?src-supplier=Factory+Futures, ComponentLink4URL=https://datasheet.octopart.com:443/SMBJ5361B-TP-MCC-datasheet-12511215.pdf?src-supplier=Factory+Futures, ComponentLink5Description=https://datasheet.octopart.com:443/SMBJ5361B-TP-MCC-datasheet-11551749.pdf?src-supplier=Arrow+Electronics, ComponentLink5URL=https://datasheet.octopart.com:443/SMBJ5361B-TP-MCC-datasheet-11551749.pdf?src-supplier=Arrow+Electronics, Composition=Zener, Country of Origin="Mainland China, Vietnam", Element Configuration=Single, Export Control Classification Number (ECCN) Code=EAR99, Harmonized Tariff Schedule (HTS) Code=8541.10.00.50, Height=2.82mm, Impedance=5Ω, Introduction Date=2002-04-11, Lead Free="Lead Free", Lifecycle Status=Production, Manufacturer Part Number=SMBJ5361B-TP, Max Operating Temperature=150°C, Mounting Technology="Surface Mount", Number of Elements=1, Number of Terminals=2, Pins=2, Polarity=Unidirectional, Power Dissipation=5W, Pricing="1=0.1196 (USD)", Radiation Hardening=No, REACH SVHC=No, RoHS=Compliant, Schedule B="8541100050, 8541100050|8541100050|8541100050|8541100050|8541100050", Stock=5, Supplier="Arrow Electronics", Supplier Part Number=SMBJ5361B-TP, Voltage Tolerance=5%, Working Voltage=27V, Zener Current=50mA, Zener Voltage=27V
D3: library part TN4015H-6I, "SCR 600 V 40 A Standard Recovery Through Hole TO-220", Hold Current=60mA, LCSC Part No=C5269098, Leakage Current=10µA, Manufacturer=STMicroelectronics, Max Junction Temperature (Tj)=150°C, Max Repetitive Reverse Voltage (Vrrm)=600V, Max RMS Current=40A, Min Operating Temperature=-40°C, Peak Non-Repetitive Surge Current=360A, Category=Thyristors, China RoHS=Non-Compliant, componentlink1description=https://datasheet.octopart.com:443/TN4015H-6I-STMicroelectronics-datasheet-67304264.pdf?src-supplier=STMicroelectronics, componentlink1url=https://datasheet.octopart.com:443/TN4015H-6I-STMicroelectronics-datasheet-67304264.pdf?src-supplier=STMicroelectronics, ComponentLink2Description=https://datasheet.octopart.com:443/TN4015H-6I-STMicroelectronics-datasheet-78772670.pdf?src-supplier=TME, ComponentLink2URL=https://datasheet.octopart.com:443/TN4015H-6I-STMicroelectronics-datasheet-78772670.pdf?src-supplier=TME, Country of Origin="Mainland China", Export Control Classification Number (ECCN) Code=EAR99, Harmonized Tariff Schedule (HTS) Code=8541.30.00.80, Introduction Date=2016-11-28, Lifecycle Status=Production, Manufacturer Part Number=TN4015H-6I, Max Operating Temperature=150°C, Number of Elements=1, Number of Terminals=3, Pricing="1000=0.6362 (USD)", REACH SVHC=No, RoHS=Compliant, Schedule B=8541300080, Stock=1000, Supplier="Arrow Electronics", Supplier Part Number=TN4015H-6I
D4 D11: library part 150060RS75000, "LED Low-Power Uni-Color Red 630nm 2V 2-Pin Chip 0603(1608Metric) T/R", Case Code (Imperial)=0603, Case Code (Metric)=1608, Color=Red, Forward Current=100mA, Forward Voltage=2V, LCSC Part No=C19171390, Manufacturer="Wurth Elektronik", Max Junction Temperature (Tj)=95°C, Max Operating Temperature=85°C, Max Reverse Voltage (DC)=5V, Min Operating Temperature=-40°C, Power Dissipation=72mW, Supplier Part Number=732-4978-6-ND, Test Current=20mA, Case/Package=0603, Category=LEDs, componentlink1description=https://datasheet.octopart.com:443/150060RS75000-W%C3%BCrth-Elektronik-datasheet-141913886.pdf?src-supplier=Upverter, componentlink1url=https://datasheet.octopart.com:443/150060RS75000-W%C3%BCrth-Elektronik-datasheet-141913886.pdf?src-supplier=Upverter, ComponentLink2Description=https://datasheet.octopart.com:443/150060RS75000-W%C3%BCrth-Elektronik-datasheet-15983787.pdf?src-supplier=Upverter, ComponentLink2URL=https://datasheet.octopart.com:443/150060RS75000-W%C3%BCrth-Elektronik-datasheet-15983787.pdf?src-supplier=Upverter, ComponentLink3Description=https://datasheet.octopart.com:443/150060RS75000-W%C3%BCrth-Elektronik-datasheet-140603451.pdf?src-supplier=Wurth+Elektronik, ComponentLink3URL=https://datasheet.octopart.com:443/150060RS75000-W%C3%BCrth-Elektronik-datasheet-140603451.pdf?src-supplier=Wurth+Elektronik, ComponentLink4Description=https://datasheet.octopart.com:443/150060RS75000-W%C3%BCrth-Elektronik-datasheet-41196438.pdf?src-supplier=Newark, ComponentLink4URL=https://datasheet.octopart.com:443/150060RS75000-W%C3%BCrth-Elektronik-datasheet-41196438.pdf?src-supplier=Newark, Dominant Wavelength=625nm, Height=700µm, Length=1.6mm, Lens Style="Clear, Rectangular", Luminous Intensity=250mcd, Manufacturer Part Number=150060RS75000, Mounting Technology="Surface Mount", Packaging="Tape and Reel", Peak Wavelength=630nm, Pricing="1=0.15, 50=0.142, 100=0.1239 (USD)", REACH SVHC=Unknown, Reverse Voltage=5V, RoHS=Compliant, Stock=362455, Supplier=DigiKey, Viewing Angle=140°, Wavelength=625nm, Width=800µm